# Altium PCB FlexCube_Matrix_4x4_Project_V1I1a_PCB.PcbDoc (part 1 of 2)
Units mm, origin at the board's own origin, x right, y up, seen from the top; angles counter-clockwise.
Board outline 86 x 86 mm, 2 copper layers (Top Layer, Bottom Layer), stack 0.735 mm thick; 84 components, 69 nets, 228 pads, 76 vias.
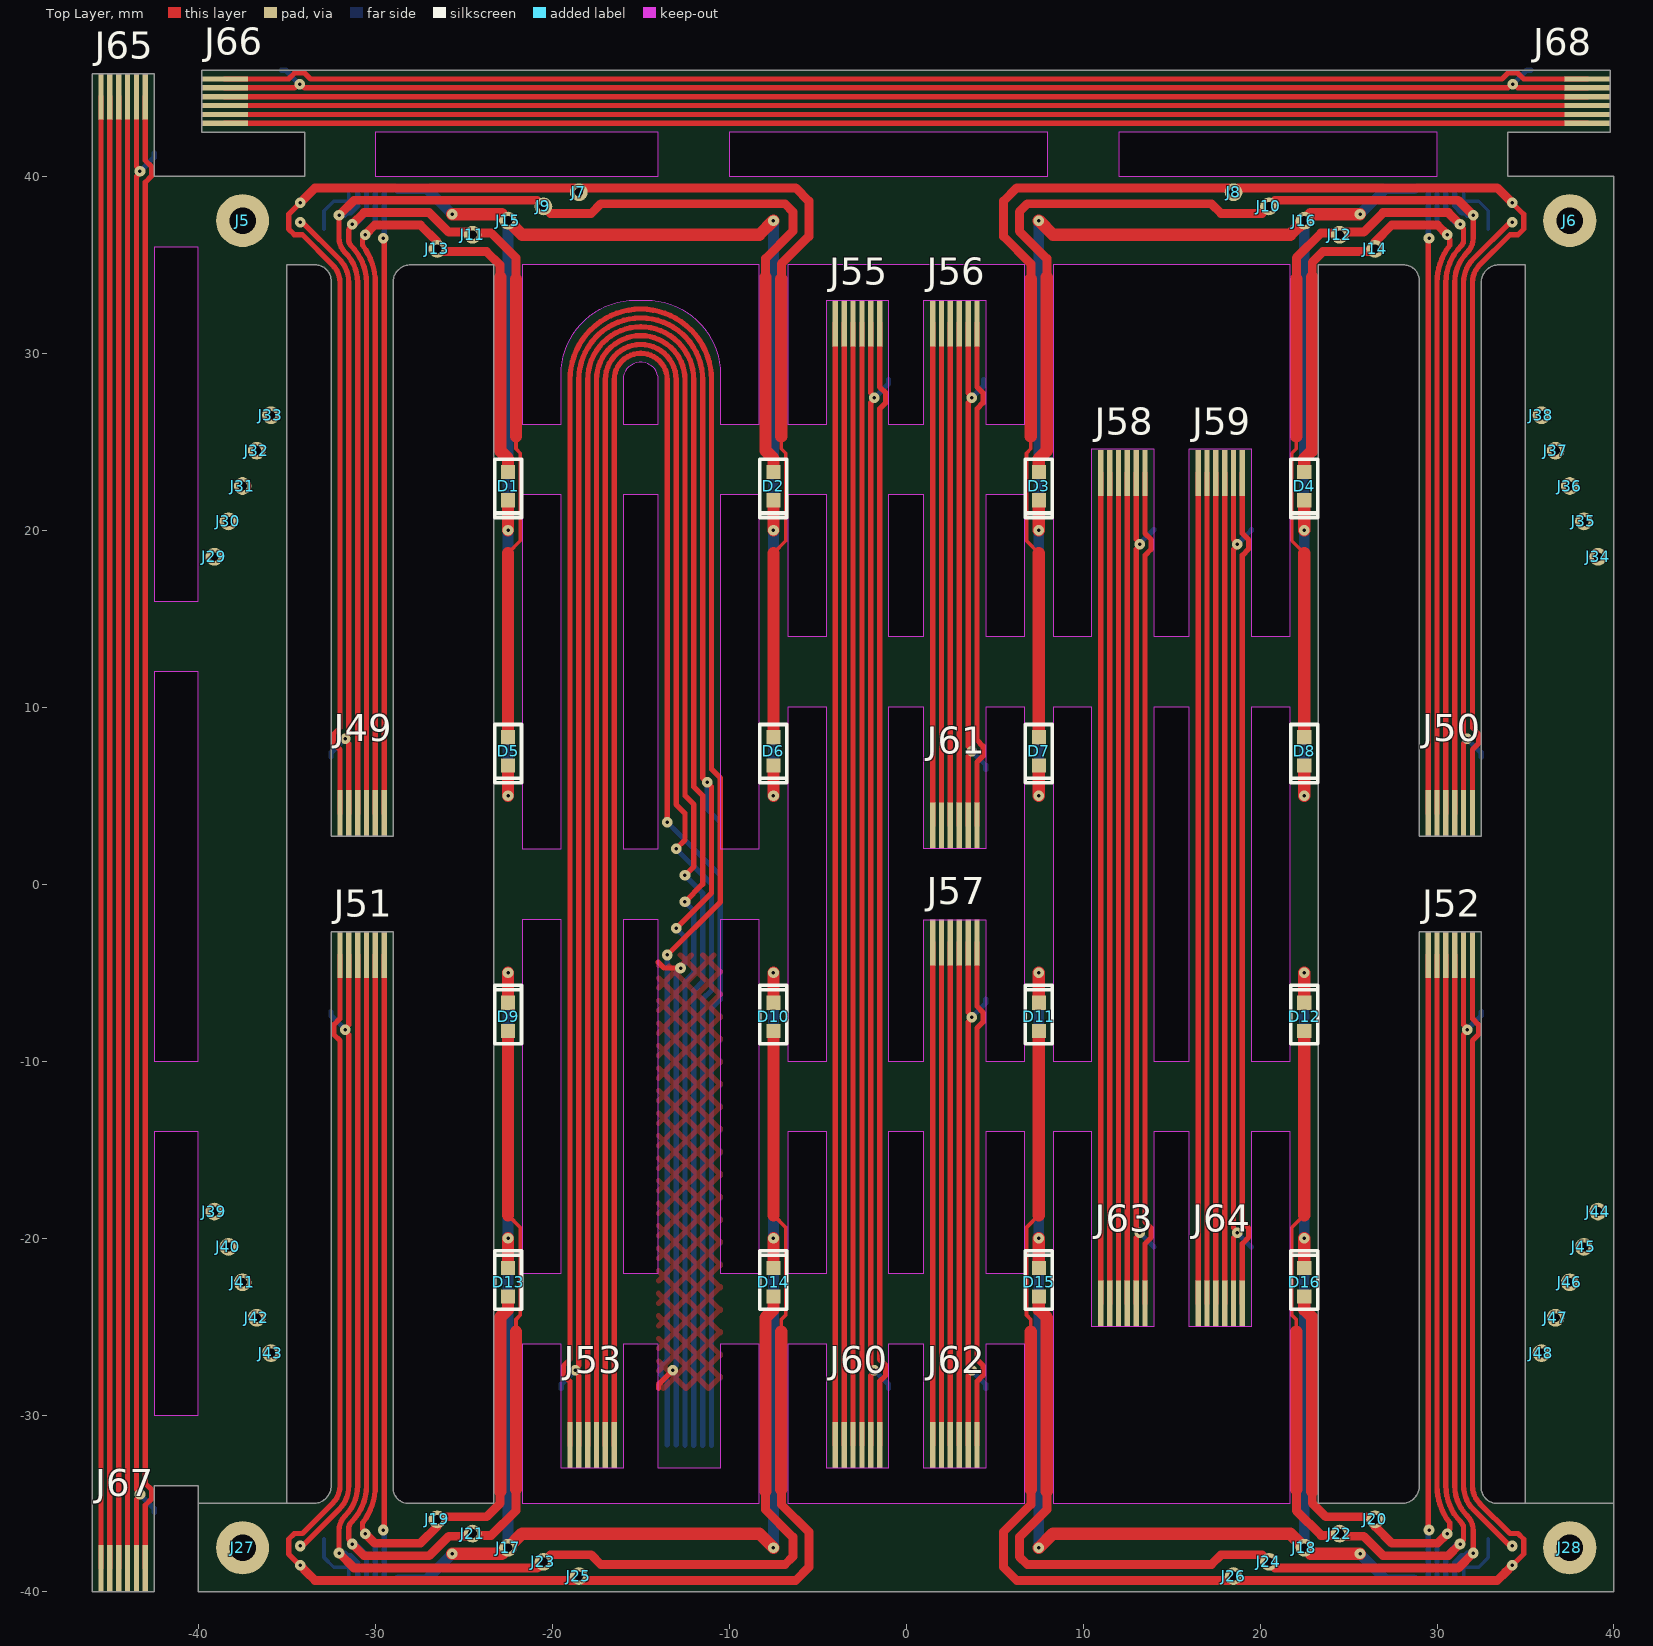
[diagram p0: Top Layer view]
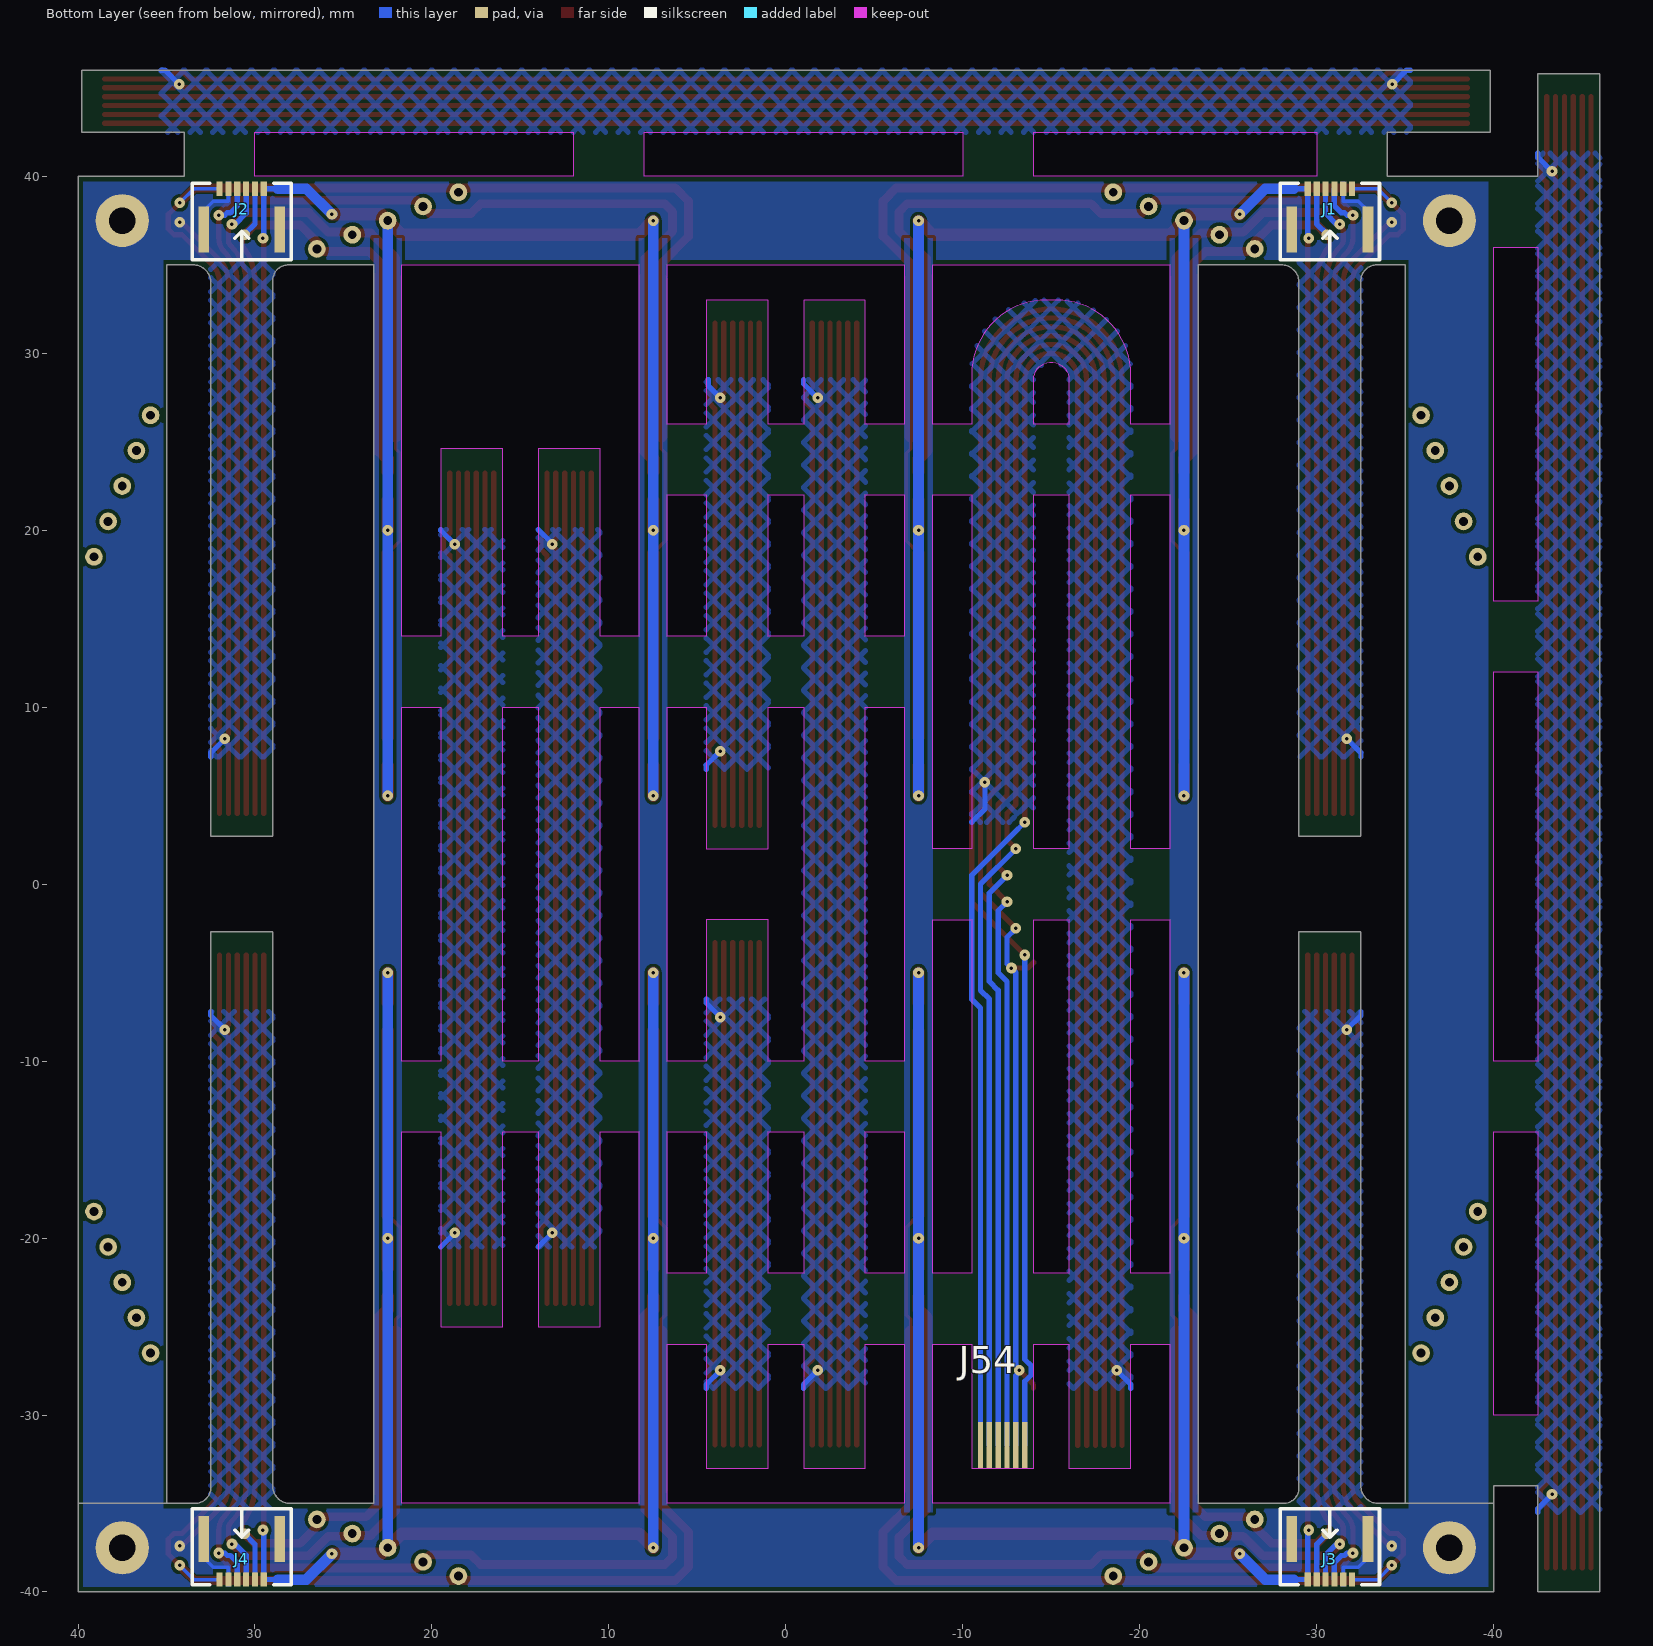
[diagram p1: Bottom Layer view, seen from below]
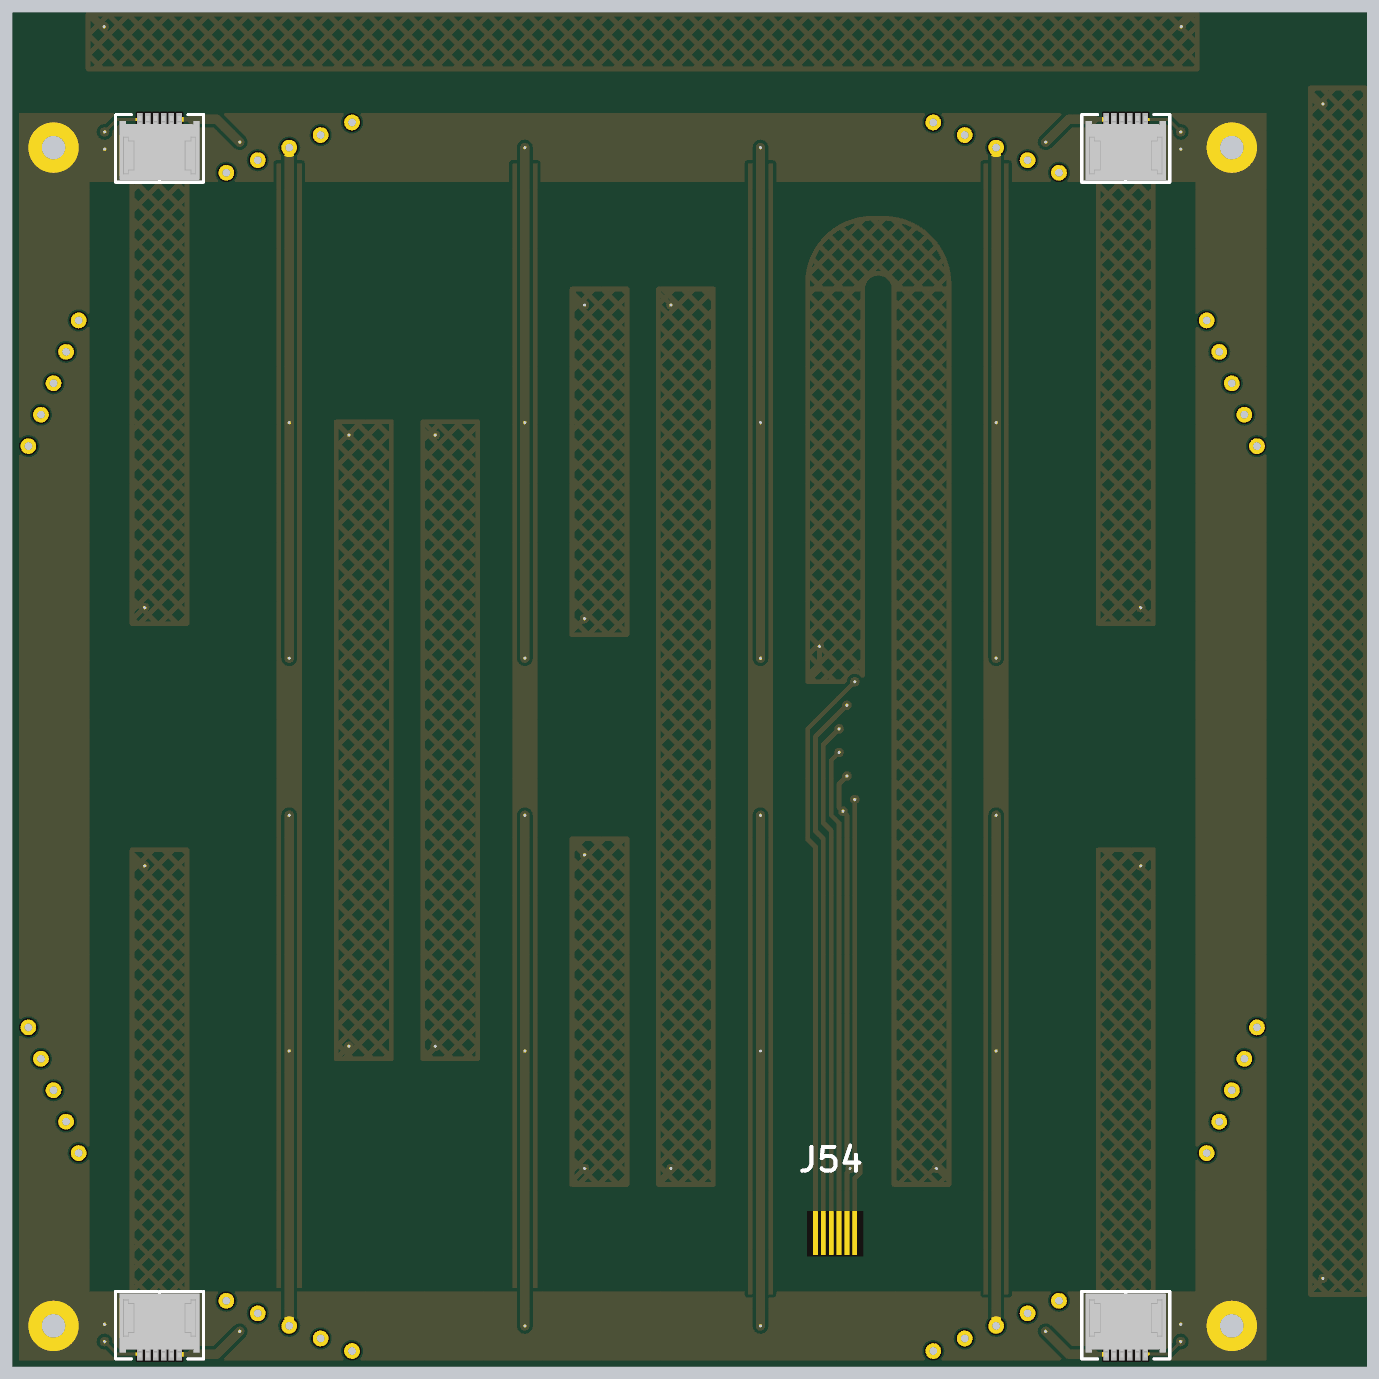
[diagram p3: 3D render of the assembled board from below, using the file's embedded part models]

## Layer stack, top to bottom
Stiffener 1: core 0.1, Core-009, Dk 4.5
No Stiffeners Top Coverlay: solder mask 0.05, FC-001, Dk 4
No Stiffeners Top Coverlay: solder mask 0.05, FC-001, Dk 4
Stiffener 5: core 0.1, Core-009, Dk 4.5
No Stiffeners Top Coverlay: solder mask 0.05, FC-001, Dk 4
Stiffener 3: core 0.1, Core-009, Dk 4.5
No Stiffeners Top Coverlay: solder mask 0.05, FC-001, Dk 4
No Stiffeners Top Coverlay: solder mask 0.05, FC-001, Dk 4
Top Layer: signal copper 0.035
Adhesive 2: prepreg 0.02, Dk 4.1
Polyimide: core 0.025, Dk 4.8
Adhesive 3: prepreg 0.02, Dk 4.1
Bottom Layer: signal copper 0.035
Bottom PI Coverlay: solder mask 0.05, FC-001, Dk 4
Bottom PI Coverlay: solder mask 0.05, FC-001, Dk 4
Stiffener 4: core 0.1, Core-009, Dk 4.5
Bottom PI Coverlay: solder mask 0.05, FC-001, Dk 4
Bottom PI Coverlay: solder mask 0.05, FC-001, Dk 4
Stiffener 6: core 0.1, Core-009, Dk 4.5
Bottom PI Coverlay: solder mask 0.05, FC-001, Dk 4
Stiffener 2: core 0.1, Core-009, Dk 4.5

## Board outline
-40,-40 40,-40 40,-35 33.369,-35 cw(c33.4,-34.101) 32.5,-34.101 32.5,-2.701 29,-2.701 29,-7.201 29,-34.001 cw(c28,-34.001) 28.031,-35 23.3,-35 23.3,35 28.1,35 cw(c28.1,34.1) 29,34.1 29,2.7 32.5,2.7 32.5,7.2 32.5,34 cw(c33.5,34) 33.5,35 35,35 35,-34.999 40,-34.999 40,35 40,40 34,40 34,42.5 39.8,42.5 39.8,46 35.3,46 -35.3,46 -39.8,46 -39.8,42.5 -35.3,42.5 -34,42.5 -34,40 -40,40 -42.5,40 -42.5,45.8 -46,45.8 -46,41.3 -46,-40 -42.5,-40 -42.5,-35.5 -42.5,-34 -40,-34 -40,-34.999 -35,-34.999 -35,35 -33.4,35 cw(c-33.4,34.1) -32.5,34.1 -32.5,2.7 -29,2.7 -29,7.2 -29,34 cw(c-28,34) -28,35 -23.3,35 -23.3,-35 -28.1,-35 cw(c-28.1,-34.1) -29,-34.1 -29,-2.7 -32.5,-2.7 -32.5,-7.2 -32.5,-34 cw(c-33.5,-34) -33.5,-35 -40,-35
cut-out: 30,40 30,42.5 12,42.5 12,40
cut-out: 8,40 8,42.5 -10,42.5 -10,40
cut-out: -30,40 -14,40 -14,42.5 -30,42.5
cut-out: -40,35 -40,36 -42.5,36 -42.5,16 -40,16
cut-out: -42.5,-30 -40,-30 -40,-14 -42.5,-14
cut-out: -42.5,-10 -40,-10 -40,12 -42.5,12
cut-out: -21.7,-35 -8.3,-35 -8.3,-26 -10.5,-26 -10.5,-33 -14,-33 -14,-28.5 -14,-26 -16,-26 -16,-33 -19.5,-33 -19.5,-28.5 -19.5,-26 -21.7,-26
cut-out: -21.7,-22 -19.5,-22 -19.5,-2 -21.7,-2
cut-out: -21.7,2 -19.5,2 -19.5,22 -21.7,22
cut-out: -10.5,-22 -8.3,-22 -8.3,-2 -10.5,-2
cut-out: -10.5,2 -8.3,2 -8.3,22 -10.5,22
cut-out: -14,-22 -14,-2 -16,-2 -16,-22
cut-out: -14,2 -14,22 -16,22 -16,2
cut-out: -6.7,-35 6.7,-35 6.7,-26 4.5,-26 4.5,-33 1,-33 1,-28.5 1,-26 -1,-26 -1,-33 -4.5,-33 -4.5,-28.5 -4.5,-26 -6.7,-26
cut-out: -6.7,-22 -4.5,-22 -4.5,-14 -6.7,-14
cut-out: -6.7,-10 -4.5,-10 -4.5,10 -6.7,10
cut-out: -6.7,14 -4.5,14 -4.5,22 -6.7,22
cut-out: -6.7,26 -4.5,26 -4.5,33 -1,33 -1,28.5 -1,26 1,26 1,33 4.5,33 4.5,28.5 4.5,26 6.7,26 6.7,35 -6.7,35
cut-out: 4.5,-22 6.7,-22 6.7,-14 4.5,-14
cut-out: 4.5,-10 6.7,-10 6.7,10 4.5,10 4.5,2 1,2 1,6.5 1,10 -1,10 -1,-10 1,-10 1,-2 4.5,-2 4.5,-6.5
cut-out: 4.5,14 6.7,14 6.7,22 4.5,22
cut-out: 1,-22 1,-14 -1,-14 -1,-22
cut-out: 1,14 1,22 -1,22 -1,14
cut-out: 8.3,-35 21.7,-35 21.7,-14 19.5,-14 19.5,-25 16,-25 16,-20.5 16,-14 14,-14 14,-25 10.5,-25 10.5,-20.5 10.5,-14 8.3,-14
cut-out: 8.3,-10 10.5,-10 10.5,10 8.3,10
cut-out: 8.3,14 10.5,14 10.5,24.6 14,24.6 14,20.1 14,14 16,14 16,24.6 19.5,24.6 19.5,20.1 19.5,14 21.7,14 21.7,35 8.3,35
cut-out: 19.5,-10 21.7,-10 21.7,10 19.5,10
cut-out: 16,-10 16,10 14,10 14,-10
cut-out: -21.7,26 -19.5,26 -19.5,28.809 cw(c-15.309,28.809) -15.309,33 -14.691,33 cw(c-14.691,28.809) -10.5,28.809 -10.5,26 -8.3,26 -8.3,35 -21.7,35
cut-out: -14,26 -14,28.5 ccw(c-15,28.5) -16,28.5 -16,26
board region "Layer Stack Region 6": -40,35 40,35 40,40 -40,40
board region "Default Layer Stack Region": -40,-40 40,-40 40,-35 -40,-35
board region "Layer Stack Region 15": 35,35 35,-34.999 40,-34.999 40,35
board region "Layer Stack Region 14": -40,35 -40,-34.999 -35,-34.999 -35,35
board region "Layer Stack Region 16": -19.5,-28.5 -19.5,28.809 -19.5,29.084 -19.428,29.628 -19.286,30.159 -19.076,30.667 -18.801,31.142 -18.467,31.578 -18.078,31.967 -17.642,32.301 -17.167,32.576 -16.659,32.786 -16.128,32.928 -15.584,33 -15.309,33 -14.691,33 -14.416,33 -13.872,32.928 -13.341,32.786 -12.833,32.576 -12.358,32.301 -11.922,31.967 -11.533,31.578 -11.199,31.142 -10.924,30.667 -10.714,30.159 -10.572,29.628 -10.5,29.084 -10.5,28.809 -10.5,-28.5 -14,-28.5 -14,28.5 -14.005,28.598 -14.043,28.79 -14.118,28.971 -14.227,29.134 -14.366,29.273 -14.529,29.382 -14.71,29.457 -14.902,29.495 -15,29.5 -15.098,29.495 -15.29,29.457 -15.471,29.382 -15.634,29.273 -15.773,29.134 -15.882,28.971 -15.957,28.79 -15.995,28.598 -16,28.5 -16,-28.5
board region "Layer Stack Region 26": -42.5,-35.5 -42.5,-8.4 -42.5,41.3 -46,41.3 -46,-8.4 -46,-35.5
board region "Layer Stack Region 37": 35.3,46 8.2,46 -35.3,46 -35.3,42.5 8.2,42.5 35.3,42.5
board region "Layer Stack Region 18": -1,-28.5 -1,28.5 -4.5,28.5 -4.5,-28.5
board region "Layer Stack Region 24": 19.5,-20.5 19.5,6.6 19.5,20.1 16,20.1 16,6.6 16,-20.5
board region "Layer Stack Region 22": 14,-20.5 14,6.6 14,20.1 10.5,20.1 10.5,6.6 10.5,-20.5
board region "Layer Stack Region 12": 32.5,7.2 32.5,34 32.505,34.098 32.543,34.29 32.618,34.471 32.727,34.634 32.866,34.773 33.029,34.882 33.21,34.957 33.402,34.995 33.5,35 28.1,35 28.188,34.996 28.361,34.961 28.524,34.894 28.671,34.796 28.796,34.671 28.894,34.524 28.961,34.361 28.996,34.188 29,34.1 29,7.2
board region "Layer Stack Region 10": -29,7.2 -29,34 -28.995,34.098 -28.957,34.29 -28.882,34.471 -28.773,34.634 -28.634,34.773 -28.471,34.882 -28.29,34.957 -28.098,34.995 -28,35 -33.4,35 -33.312,34.996 -33.139,34.961 -32.976,34.894 -32.829,34.796 -32.704,34.671 -32.606,34.524 -32.539,34.361 -32.504,34.188 -32.5,34.1 -32.5,7.2
board region "Layer Stack Region 4": 29,-7.201 29,-34.001 28.995,-34.099 28.956,-34.291 28.881,-34.472 28.773,-34.635 28.634,-34.774 28.471,-34.882 28.29,-34.957 28.098,-34.996 28,-35.001 33.4,-35.001 33.311,-34.996 33.138,-34.962 32.975,-34.894 32.829,-34.796 32.704,-34.671 32.606,-34.525 32.538,-34.362 32.504,-34.189 32.5,-34.101 32.5,-7.201
board region "Layer Stack Region 1": -32.5,-7.2 -32.5,-34 -32.505,-34.098 -32.543,-34.29 -32.618,-34.471 -32.727,-34.634 -32.866,-34.773 -33.029,-34.882 -33.21,-34.957 -33.402,-34.995 -33.5,-35 -28.1,-35 -28.188,-34.996 -28.361,-34.961 -28.524,-34.894 -28.671,-34.796 -28.796,-34.671 -28.894,-34.524 -28.961,-34.361 -28.996,-34.188 -29,-34.1 -29,-7.2
board region "Layer Stack Region 33": 4.5,6.5 4.5,28.5 1,28.5 1,6.5
board region "Layer Stack Region 20": 4.5,-28.5 4.5,-6.5 1,-6.5 1,-28.5
board region "Layer Stack Region 38": 35.3,46 39.8,46 39.8,42.5 35.3,42.5
board region "Layer Stack Region 13": 32.5,7.2 32.5,2.7 29,2.7 29,7.2
board region "Layer Stack Region 5": 29,-7.201 29,-2.701 32.5,-2.701 32.5,-7.201
board region "Layer Stack Region 25": 19.5,-20.5 19.5,-25 16,-25 16,-20.5
board region "Layer Stack Region 35": 16,20.1 16,24.6 19.5,24.6 19.5,20.1
board region "Layer Stack Region 23": 14,-20.5 14,-25 10.5,-25 10.5,-20.5
board region "Layer Stack Region 34": 10.5,20.1 10.5,24.6 14,24.6 14,20.1
board region "Layer Stack Region 32": 4.5,6.5 4.5,2 1,2 1,6.5
board region "Layer Stack Region 21": 4.5,-28.5 4.5,-33 1,-33 1,-28.5
board region "Layer Stack Region 30": 1,28.5 1,33 4.5,33 4.5,28.5
board region "Layer Stack Region 19": -1,-28.5 -1,-33 -4.5,-33 -4.5,-28.5
board region "Layer Stack Region 29": -4.5,28.5 -4.5,33 -1,33 -1,28.5
board region "Layer Stack Region 27": -10.5,-28.5 -10.5,-33 -14,-33 -14,-28.5
board region "Layer Stack Region 17": -16,-28.5 -16,-33 -19.5,-33 -19.5,-28.5
board region "Layer Stack Region 11": -29,7.2 -29,2.7 -32.5,2.7 -32.5,7.2
board region "Layer Stack Region 2": -32.5,-7.2 -32.5,-2.7 -29,-2.7 -29,-7.2
board region "Layer Stack Region 39": -35.3,42.5 -39.8,42.5 -39.8,46 -35.3,46
board region "Layer Stack Region 28": -42.5,-35.5 -42.5,-40 -46,-40 -46,-35.5
board region "Layer Stack Region 36": -46,41.3 -46,45.8 -42.5,45.8 -42.5,41.3
board region "Layer Stack Region 31": 1,-6.5 1,-2 4.5,-2 4.5,-6.5
board region "Layer Stack Region 9": 21.7,-35 21.7,-34.9 21.7,34.9 21.7,35 23.3,35 23.3,34.9 23.3,-34.9 23.3,-35
board region "Layer Stack Region 8": 6.7,-35 6.7,-34.9 6.7,34.9 6.7,35 8.3,35 8.3,34.9 8.3,-34.9 8.3,-35
board region "Layer Stack Region 7": -8.3,-35 -8.3,-34.9 -8.3,34.9 -8.3,35 -6.7,35 -6.7,34.9 -6.7,-34.9 -6.7,-35
board region "Layer Stack Region 3": -23.3,-35 -23.3,-34.9 -23.3,34.9 -23.3,35 -21.7,35 -21.7,34.9 -21.7,-34.9 -21.7,-35
board region "Layer Stack Region 74": 34,40 30,40 30,42.5 34,42.5
board region "Layer Stack Region 73": 12,40 8,40 8,42.5 12,42.5
board region "Layer Stack Region 72": -10,40 -14,40 -14,42.5 -10,42.5
board region "Layer Stack Region 71": -30,40 -34,40 -34,42.5 -30,42.5
board region "Layer Stack Region 67": -42.5,36 -42.5,40 -40,40 -40,36
board region "Layer Stack Region 69": -42.5,12 -42.5,16 -40,16 -40,12
board region "Layer Stack Region 70": -42.5,-14 -42.5,-10 -40,-10 -40,-14
board region "Layer Stack Region 68": -42.5,-34 -42.5,-30 -40,-30 -40,-34
board region "Layer Stack Region 40": 19.5,14 19.5,10 21.7,10 21.7,14
board region "Layer Stack Region 41": 19.5,-14 19.5,-10 21.7,-10 21.7,-14
board region "Layer Stack Region 44": 8.3,14 8.3,10 10.5,10 10.5,14
board region "Layer Stack Region 45": 8.3,-14 8.3,-10 10.5,-10 10.5,-14
board region "Layer Stack Region 47": 4.5,22 4.5,26 6.7,26 6.7,22
board region "Layer Stack Region 46": 4.5,14 4.5,10 6.7,10 6.7,14
board region "Layer Stack Region 48": 4.5,-14 4.5,-10 6.7,-10 6.7,-14
board region "Layer Stack Region 49": 4.5,-22 4.5,-26 6.7,-26 6.7,-22
board region "Layer Stack Region 56": -6.7,22 -6.7,26 -4.5,26 -4.5,22
board region "Layer Stack Region 57": -6.7,14 -6.7,10 -4.5,10 -4.5,14
board region "Layer Stack Region 55": -6.7,-14 -6.7,-10 -4.5,-10 -4.5,-14
board region "Layer Stack Region 54": -6.7,-22 -6.7,-26 -4.5,-26 -4.5,-22
board region "Layer Stack Region 58": -10.5,22 -10.5,26 -8.3,26 -8.3,22
board region "Layer Stack Region 59": -10.5,-2 -10.5,2 -8.3,2 -8.3,-2
board region "Layer Stack Region 60": -10.5,-26 -10.5,-22 -8.3,-22 -8.3,-26
board region "Layer Stack Region 66": -21.7,22 -21.7,26 -19.5,26 -19.5,22
board region "Layer Stack Region 65": -21.7,-2 -21.7,2 -19.5,2 -19.5,-2
board region "Layer Stack Region 64": -21.7,-26 -21.7,-22 -19.5,-22 -19.5,-26
board region "Layer Stack Region 43": 14,14 14,10 16,10 16,14
board region "Layer Stack Region 42": 14,-14 14,-10 16,-10 16,-14
board region "Layer Stack Region 52": -1,22 -1,26 1,26 1,22
board region "Layer Stack Region 53": -1,14 -1,10 1,10 1,14
board region "Layer Stack Region 51": -1,-14 -1,-10 1,-10 1,-14
board region "Layer Stack Region 50": -1,-22 -1,-26 1,-26 1,-22
board region "Layer Stack Region 63": -16,22 -16,26 -14,26 -14,22
board region "Layer Stack Region 62": -16,-2 -16,2 -14,2 -14,-2
board region "Layer Stack Region 61": -16,-26 -16,-22 -14,-22 -14,-26

## Design rules (kind name [scope] priority, off if disabled: settings)
BoardOutlineClearance "Outline vs Silk" [(OnLayer('Top Overlay') OR OnLayer('Bottom Overlay'))] p1 off: gap=0.1 ignorepadtopadclearanceinfootprint=FALSE
BoardOutlineClearance "Connector exception" [HasFootprint('0512810694')] p2 off: gap=0.2 ignorepadtopadclearanceinfootprint=FALSE
BoardOutlineClearance "FFC Exception" [HasFootprint('FFC_ENDING_0512810694')] p3 off: gap=0.1 ignorepadtopadclearanceinfootprint=FALSE except(0: SMDPad-OutlineEdge SMDPad-CavityEdge SMDPad-CutoutEdge SMDPad-SplitBarrior SMDPad-SplitContinuation)
BoardOutlineClearance [All] p4 off: gap=0.3 ignorepadtopadclearanceinfootprint=FALSE except(0: Arc-SplitContinuation Track-SplitContinuation SMDPad-SplitContinuation THPad-SplitContinuation Via-SplitContinuation Fill-SplitContinuation Poly-SplitContinuation Region-SplitContinuation; 0.1: Text-OutlineEdge Text-CavityEdge Text-CutoutEdge Text-SplitBarrior Text-SplitContinuation)
Clearance "Under connector" [HasFootprint('0512810694')] p1: gap=0.2 ignorepadtopadclearanceinfootprint=FALSE except(0.1: Arc-SMDPad Track-SMDPad SMDPad-SMDPad)
Clearance "FFC Clearance" [All vs HasFootprint('FFC_ENDING_0512810694')] p2: gap=0.01 ignorepadtopadclearanceinfootprint=FALSE
Clearance [All] p3: gap=0.2 ignorepadtopadclearanceinfootprint=FALSE
DiffPairsRouting [All] p1: maxlimit=0.254 minlimit=0.254 mostfreqgap=0.254 substack1={4D4FE3D4-C86A-4D8D-9A31-E9C674529DF9} toplayer_{4d4fe3d4-c86a-4d8d-9a31-e9c674529df9}_minwidth=0.381 toplayer_{4d4fe3d4-c86a-4d8d-9a31-e9c674529df9}_maxwidth=0.381 toplayer_{4d4fe3d4-c86a-4d8d-9a31-e9c674529df9}_prefwidth=0.381 bottomlayer_{4d4fe3d4-c86a-4d8d-9a31-e9c674529df9}_minwidth=0.381 bottomlayer_{4d4fe3d4-c86a-4d8d-9a31-e9c674529df9}_maxwidth=0.381 bottomlayer_{4d4fe3d4-c86a-4d8d-9a31-e9c674529df9}_prefwidth=0.381 substack2={CABC8916-1110-40C6-A124-50F6A54FA35A} toplayer_{cabc8916-1110-40c6-a124-50f6a54fa35a}_minwidth=0.381 toplayer_{cabc8916-1110-40c6-a124-50f6a54fa35a}_maxwidth=0.381 toplayer_{cabc8916-1110-40c6-a124-50f6a54fa35a}_prefwidth=0.381 bottomlayer_{cabc8916-1110-40c6-a124-50f6a54fa35a}_minwidth=0.381 bottomlayer_{cabc8916-1110-40c6-a124-50f6a54fa35a}_maxwidth=0.381 bottomlayer_{cabc8916-1110-40c6-a124-50f6a54fa35a}_prefwidth=0.381 substack3={34FC4AC9-0BA1-41C3-8501-FC3EAB3F46DA} toplayer_{34fc4ac9-0ba1-41c3-8501-fc3eab3f46da}_minwidth=0.381 toplayer_{34fc4ac9-0ba1-41c3-8501-fc3eab3f46da}_maxwidth=0.381 toplayer_{34fc4ac9-0ba1-41c3-8501-fc3eab3f46da}_prefwidth=0.381 bottomlayer_{34fc4ac9-0ba1-41c3-8501-fc3eab3f46da}_minwidth=0.381 bottomlayer_{34fc4ac9-0ba1-41c3-8501-fc3eab3f46da}_maxwidth=0.381 bottomlayer_{34fc4ac9-0ba1-41c3-8501-fc3eab3f46da}_prefwidth=0.381 substack4={C53A0A96-B777-486A-9665-F5F59052C0ED} toplayer_{c53a0a96-b777-486a-9665-f5f59052c0ed}_minwidth=0.381 toplayer_{c53a0a96-b777-486a-9665-f5f59052c0ed}_maxwidth=0.381 toplayer_{c53a0a96-b777-486a-9665-f5f59052c0ed}_prefwidth=0.381 bottomlayer_{c53a0a96-b777-486a-9665-f5f59052c0ed}_minwidth=0.381 bottomlayer_{c53a0a96-b777-486a-9665-f5f59052c0ed}_maxwidth=0.381 bottomlayer_{c53a0a96-b777-486a-9665-f5f59052c0ed}_prefwidth=0.381 toplayer_minwidth=0.381 toplayer_maxwidth=0.381 toplayer_prefwidth=0.381 bottomlayer_minwidth=0.381 bottomlayer_maxwidth=0.381 bottomlayer_prefwidth=0.381 substack5={CB2A3869-3EAB-46B1-B9AD-A7A7CE6A4B21} toplayer_{cb2a3869-3eab-46b1-b9ad-a7a7ce6a4b21}_minwidth=0.381 toplayer_{cb2a3869-3eab-46b1-b9ad-a7a7ce6a4b21}_maxwidth=0.381 toplayer_{cb2a3869-3eab-46b1-b9ad-a7a7ce6a4b21}_prefwidth=0.381 bottomlayer_{cb2a3869-3eab-46b1-b9ad-a7a7ce6a4b21}_minwidth=0.381 bottomlayer_{cb2a3869-3eab-46b1-b9ad-a7a7ce6a4b21}_maxwidth=0.381 bottomlayer_{cb2a3869-3eab-46b1-b9ad-a7a7ce6a4b21}_prefwidth=0.381 substack6={19DDFB09-C3BA-4E3F-9BBF-CB30F192C395} toplayer_{19ddfb09-c3ba-4e3f-9bbf-cb30f192c395}_minwidth=0.381 toplayer_{19ddfb09-c3ba-4e3f-9bbf-cb30f192c395}_maxwidth=0.381 toplayer_{19ddfb09-c3ba-4e3f-9bbf-cb30f192c395}_prefwidth=0.381 bottomlayer_{19ddfb09-c3ba-4e3f-9bbf-cb30f192c395}_minwidth=0.381 bottomlayer_{19ddfb09-c3ba-4e3f-9bbf-cb30f192c395}_maxwidth=0.381 bottomlayer_{19ddfb09-c3ba-4e3f-9bbf-cb30f192c395}_prefwidth=0.381 maxuncoupledlength=12.7
HoleSize [All] p1: absolutevalues=TRUE maxlimit=2.54 minlimit=0 maxpercent=80.000 minpercent=20.000
PlaneClearance [All] p1: clearance=0.3
PolygonConnect [All] p1: connectstyle=Direct reliefconductorwidth=0.254 reliefentries=4 polygonreliefangle="90 Angle" airgapwidth=0.254
RoutingVias [All] p1: holewidth=0.2 width=0.6 viastyle="Through Hole" minholewidth=0.2 minwidth=0.6 maxholewidth=0.2 maxwidth=0.6
SilkToSolderMaskClearance [IsPad] p1: minsilkscreentomaskgap=0.1 clearancetoexposedcopper=TRUE
SolderMaskExpansion [All] p1: expansion=0.102 istentingtop=FALSE
Width [All] p1: maxlimit=5 minlimit=0.2 preferedwidth=0.3 substack1={4D4FE3D4-C86A-4D8D-9A31-E9C674529DF9} substack2={CABC8916-1110-40C6-A124-50F6A54FA35A} substack3={34FC4AC9-0BA1-41C3-8501-FC3EAB3F46DA} substack4={C53A0A96-B777-486A-9665-F5F59052C0ED} substack5={CB2A3869-3EAB-46B1-B9AD-A7A7CE6A4B21} substack6={19DDFB09-C3BA-4E3F-9BBF-CB30F192C395}
26 further rules are at their usual default settings.

## Components (designator, comment, footprint, x,y, rotation, side; value= is the part's Value field where it differs from the comment)
D1 "Red" LED_0603 -22.5,22.5 r90 top
D2 "Red" LED_0603 -7.5,22.5 r90 top
D3 "Red" LED_0603 7.5,22.5 r90 top
D4 "Red" LED_0603 22.5,22.5 r90 top
D5 "Red" LED_0603 -22.5,7.5 r90 top
D6 "Red" LED_0603 -7.5,7.5 r90 top
D7 "Red" LED_0603 7.5,7.5 r90 top
D8 "Red" LED_0603 22.5,7.5 r90 top
D9 "Red" LED_0603 -22.5,-7.5 r270 top
D10 "Red" LED_0603 -7.5,-7.5 r270 top
D11 "Red" LED_0603 7.5,-7.5 r270 top
D12 "Red" LED_0603 22.5,-7.5 r270 top
D13 "Red" LED_0603 -22.5,-22.5 r270 top
D14 "Red" LED_0603 -7.5,-22.5 r270 top
D15 "Red" LED_0603 7.5,-22.5 r270 top
D16 "Red" LED_0603 22.5,-22.5 r270 top
J1 "Molex 0512810694" 0512810694 -30.75,37 r270 bottom
J2 "Molex 0512810694" 0512810694 30.75,37 r270 bottom
J3 "Molex 0512810694" 0512810694 -30.75,-37 r90 bottom
J4 "Molex 0512810694" 0512810694 30.75,-37 r90 bottom
J5 "PAD D3MM H1MM5" PAD_D3MM_H1MM5 -37.5,37.5 r0 top
J6 "PAD D3MM H1MM5" PAD_D3MM_H1MM5 37.5,37.5 r0 top
J7 "PAD D1MM H0MM5" PAD_D1MM_H0MM5 -18.5,39.1 r0 top
J8 "PAD D1MM H0MM5" PAD_D1MM_H0MM5 18.5,39.1 r0 top
J9 "PAD D1MM H0MM5" PAD_D1MM_H0MM5 -20.5,38.3 r0 top
J10 "PAD D1MM H0MM5" PAD_D1MM_H0MM5 20.5,38.3 r90 top
J11 "PAD D1MM H0MM5" PAD_D1MM_H0MM5 -24.5,36.7 r90 top
J12 "PAD D1MM H0MM5" PAD_D1MM_H0MM5 24.5,36.7 r90 top
J13 "PAD D1MM H0MM5" PAD_D1MM_H0MM5 -26.5,35.9 r90 top
J14 "PAD D1MM H0MM5" PAD_D1MM_H0MM5 26.5,35.9 r90 top
J15 "PAD D1MM H0MM5" PAD_D1MM_H0MM5 -22.5,37.5 r90 top
J16 "PAD D1MM H0MM5" PAD_D1MM_H0MM5 22.5,37.5 r90 top
J17 "PAD D1MM H0MM5" PAD_D1MM_H0MM5 -22.5,-37.5 r90 top
J18 "PAD D1MM H0MM5" PAD_D1MM_H0MM5 22.5,-37.5 r90 top
J19 "PAD D1MM H0MM5" PAD_D1MM_H0MM5 -26.5,-35.9 r90 top
J20 "PAD D1MM H0MM5" PAD_D1MM_H0MM5 26.5,-35.9 r90 top
J21 "PAD D1MM H0MM5" PAD_D1MM_H0MM5 -24.5,-36.7 r90 top
J22 "PAD D1MM H0MM5" PAD_D1MM_H0MM5 24.5,-36.7 r90 top
J23 "PAD D1MM H0MM5" PAD_D1MM_H0MM5 -20.5,-38.3 r90 top
J24 "PAD D1MM H0MM5" PAD_D1MM_H0MM5 20.5,-38.3 r90 top
J25 "PAD D1MM H0MM5" PAD_D1MM_H0MM5 -18.5,-39.1 r90 top
J26 "PAD D1MM H0MM5" PAD_D1MM_H0MM5 18.5,-39.1 r90 top
J27 "PAD D3MM H1MM5" PAD_D3MM_H1MM5 -37.5,-37.5 r0 top
J28 "PAD D3MM H1MM5" PAD_D3MM_H1MM5 37.5,-37.5 r0 top
J29 "PAD D1MM H0MM5" PAD_D1MM_H0MM5 -39.1,18.5 r90 top
J30 "PAD D1MM H0MM5" PAD_D1MM_H0MM5 -38.3,20.5 r90 top
J31 "PAD D1MM H0MM5" PAD_D1MM_H0MM5 -37.5,22.5 r90 top
J32 "PAD D1MM H0MM5" PAD_D1MM_H0MM5 -36.7,24.5 r90 top
J33 "PAD D1MM H0MM5" PAD_D1MM_H0MM5 -35.9,26.5 r90 top
J34 "PAD D1MM H0MM5" PAD_D1MM_H0MM5 39.1,18.5 r90 top
J35 "PAD D1MM H0MM5" PAD_D1MM_H0MM5 38.3,20.5 r90 top
J36 "PAD D1MM H0MM5" PAD_D1MM_H0MM5 37.5,22.5 r90 top
J37 "PAD D1MM H0MM5" PAD_D1MM_H0MM5 36.7,24.5 r90 top
J38 "PAD D1MM H0MM5" PAD_D1MM_H0MM5 35.9,26.5 r90 top
J39 "PAD D1MM H0MM5" PAD_D1MM_H0MM5 -39.1,-18.5 r90 top
J40 "PAD D1MM H0MM5" PAD_D1MM_H0MM5 -38.3,-20.5 r90 top
J41 "PAD D1MM H0MM5" PAD_D1MM_H0MM5 -37.5,-22.5 r90 top
J42 "PAD D1MM H0MM5" PAD_D1MM_H0MM5 -36.7,-24.5 r90 top
J43 "PAD D1MM H0MM5" PAD_D1MM_H0MM5 -35.9,-26.5 r90 top
J44 "PAD D1MM H0MM5" PAD_D1MM_H0MM5 39.1,-18.5 r90 top
J45 "PAD D1MM H0MM5" PAD_D1MM_H0MM5 38.3,-20.5 r90 top
J46 "PAD D1MM H0MM5" PAD_D1MM_H0MM5 37.5,-22.5 r90 top
J47 "PAD D1MM H0MM5" PAD_D1MM_H0MM5 36.7,-24.5 r90 top
J48 "PAD D1MM H0MM5" PAD_D1MM_H0MM5 35.9,-26.5 r90 top
J49 "FFC ENDING 0512810694" FFC_ENDING_0512810694 -30.75,4.01 r270 top
J50 "FFC ENDING 0512810694" FFC_ENDING_0512810694 30.75,4.01 r270 top
J51 "FFC ENDING 0512810694" FFC_ENDING_0512810694 -30.75,-4.01 r90 top
J52 "FFC ENDING 0512810694" FFC_ENDING_0512810694 30.75,-4.01 r90 top
J53 "FFC ENDING 0512810694" FFC_ENDING_0512810694 -17.75,-31.69 r270 top
J54 "FFC ENDING 0512810694" FFC_ENDING_0512810694 -12.25,-31.69 r270 bottom
J55 "FFC ENDING 0512810694" FFC_ENDING_0512810694 -2.75,31.69 r90 top
J56 "FFC ENDING 0512810694" FFC_ENDING_0512810694 2.75,31.69 r90 top
J57 "FFC ENDING 0512810694" FFC_ENDING_0512810694 2.75,-3.31 r90 top
J58 "FFC ENDING 0512810694" FFC_ENDING_0512810694 12.25,23.234 r90 top
J59 "FFC ENDING 0512810694" FFC_ENDING_0512810694 17.75,23.234 r90 top
J60 "FFC ENDING 0512810694" FFC_ENDING_0512810694 -2.75,-31.69 r270 top
J61 "FFC ENDING 0512810694" FFC_ENDING_0512810694 2.75,3.31 r270 top
J62 "FFC ENDING 0512810694" FFC_ENDING_0512810694 2.75,-31.69 r270 top
J63 "FFC ENDING 0512810694" FFC_ENDING_0512810694 12.25,-23.69 r270 top
J64 "FFC ENDING 0512810694" FFC_ENDING_0512810694 17.75,-23.69 r270 top
J65 "FFC ENDING 0512810694" FFC_ENDING_0512810694 -44.25,44.5 r90 top
J66 "FFC ENDING 0512810694" FFC_ENDING_0512810694 -38.5,44.25 r180 top
J67 "FFC ENDING 0512810694" FFC_ENDING_0512810694 -44.25,-38.65 r270 top
J68 "FFC ENDING 0512810694" FFC_ENDING_0512810694 38.5,44.25 r0 top

## Footprints (in the part's own frame and the unit in brackets; to place one, negate y for a bottom-side part, rotate by r counter-clockwise, add the part's x,y. Pads: shape width x height; smd on the part's side, far side on the other; paste and mask are expansions set on the pad)
0512810694 [mm]
  rect 0.8x0.35 smd: 1(-2.3,1.25) 2(-2.3,0.75) 3(-2.3,0.25) 4(-2.3,-0.25) 5(-2.3,-0.75) 6(-2.3,-1.25)
  rect 2.6x0.6 smd: 7(0,-2.15) 8(0,2.15)
  silkscreen extent -2.6,-2.8 1.7,2.8, body extent -2.5,-2.55 1.55,2.55, height 1.21
FFC_ENDING_0512810694 [mm]
  rect 2.6x0.3 smd paste-10: 1(0,1.25) 2(0,0.75) 3(0,0.25) 4(0,-0.25) 5(0,-0.75) 6(0,-1.25)
LED_0603 [mm]
  rect 0.8x0.8 smd: 1(-0.8,0) 2(0.8,0)
  silkscreen extent -1.78,-0.76 1.52,0.76, body extent -0.85,-0.4 0.85,0.4, height 0.66
PAD_D1MM_H0MM5 [mm]
  round 1 hole 0.5: 1(0,0)
PAD_D3MM_H1MM5 [mm]
  round 3 hole 1.5: 1(0,0)

## Part data
D1 D2 D3 D4 D5 D6 D7 D8 D9 D10 D11 D12 D13 D14 D15 D16: library part "LS L29K-H1J2-1-Z", "LED SMARTLED RED 630NM 0603 SMD", Current - Test=2mA, Luminous Flux @ Current - Test="20 mlm", Manufacturer="OSRAM Opto Semiconductors Inc", Millicandela Rating=4.95mcd, Package / Case="0603 (1608 Metric)", Supplier Part Number 1=475-1195-1-ND, Voltage - Forward (Vf) Typ=1.8V, .Checked PCB=used, .Checked SCH=used, Category=Optoelectronics, Color=Red, ComponentLink1Description=http://catalog.osram-os.com/catalogue/catalogue.do;jsessionid=DB7CFDBAC5AF1E216E45F622E867085A?act=downloadFile&favOid=020000010003f9de000100b6, ComponentLink1URL=http://catalog.osram-os.com/catalogue/catalogue.do;jsessionid=DB7CFDBAC5AF1E216E45F622E867085A?act=downloadFile&favOid=020000010003f9de000100b6, Height=0.65mm, Lens Style/Size="Rectangle with Flat Top, 1.3mm x 0.8mm", Lens Type=Diffused, Manufacturer Part Number="LS L29K-H1J2-1-Z", Mounting Type="Surface Mount", Packaging="Cut Tape (CT)", Pricing 1="1=0.16, 10=0.137, 100=0.1093, 250=0.09564, 500=0.08744 (USD)", RoHS="RoHS Compliant", Size / Dimension="1.70mm L x 0.80mm W", Stock 1=71670, Supplier 1=Digi-Key, Viewing Angle=160°, Wavelength - Dominant=630nm, Wavelength - Peak=643nm
J1 J2 J3 J4: library part 0512810694, "Conn FPC Connector SKT 6 POS 0.5mm Solder RA SMD Easy-On™ Embossed T/R", Contact Resistance=20mR, Current Rating=500mA, Flammability Rating="UL94 V-0", Housing Colour=Natural, Manufacturer=Molex, Max Operating Temperature=85°C, Min Operating Temperature=-20°C, Package Quantity=3000, Supplier Part Number 1=WM10922DKR-ND, Voltage Rating=50V, .Creator=RF, Category="Connectors, Interconnects", ComponentLink1Description=http://www.molex.com/pdm_docs/sd/512810694_sd.pdf, ComponentLink1URL=http://www.molex.com/pdm_docs/sd/512810694_sd.pdf, ComponentLink2Description=http://www.molex.com/webdocs/datasheets/pdf/en-us/0512810694_FFC_FPC_CONNECTORS.pdf, ComponentLink2URL=http://www.molex.com/webdocs/datasheets/pdf/en-us/0512810694_FFC_FPC_CONNECTORS.pdf, ComponentLink3Description=https://www.verical.com/server-webapp/html/getDatasheet?partID=195210, ComponentLink3URL=https://www.verical.com/server-webapp/html/getDatasheet?partID=195210, Contact Material=Bronze, Contact Plating=Gold, Depth=3.75mm, Housing Material=Polymer, Length=5.1mm, Manufacturer Part Number=0512810694, Mount="Surface Mount", Number of Contacts=6, Number of Positions=6, Number of Rows=1, Orientation="Right Angle", Packaging="Tape and Reel", Pitch=0.5mm, Pricing 1="1=0.54, 10=0.507, 25=0.456, 50=0.4056, 100=0.3886, 250=0.3548, 500=0.33792, 1000=0.27878 (USD)", Radiation Hardening=No, Stock 1=21985, Supplier 1=Digi-Key, Termination=Solder, Wire/Cable Type=Straight

## Via types
v1: diameter 0.6, hole 0.2, Top Layer to Bottom Layer, tented both sides, 76 vias

## Nets (pads, with @x,y where several pads share a name; then routed paths per layer and width w, separated by ;. In a path a pad name is that pad's centre, name@x,y a point inside that pad or via, vN(x,y) a via of type N, cw(c..) or ccw(c..) an arc to the next point about the centre after c; other vN are vias at no path point)
COMMON_CATHODE_1: D1.1 D2.1 D5.1 D6.1 J1.6 J15.1 J49.1 | length 130.9
  Top Layer w0.2: v1(-22.5,20) -22.5,20.4 ; v1(-7.5,20) -7.5,20.4
  Top Layer w0.3: v1(-29.55,36.5) -29.5,36.45 -29.5,35.1 J49.1@-29.5,4.01 J49.1@-29.5,4
  Top Layer w0.7: v1(-25.65,37.85) J15.1@-22.85,37.85 ; v1(-22.5,5) D5.1@-22.5,6.7 ; v1(-22.5,20) D1.1@-22.5,21.7 ; J15.1@-22.5,37.5 -21.7,36.7 -8.3,36.7 v1(-7.5,37.5) ; v1(-7.5,5) D6.1@-7.5,6.7 ; v1(-7.5,20) D2.1@-7.5,21.7
  Bottom Layer w0.3: v1(-29.55,36.5) -29.5,36.55 J1.6@-29.5,39.3 -28.701,39.3 -28.7,39.299
  Bottom Layer w0.6: -28.7,39.299 -27.099,39.299 v1(-25.65,37.85) ; v1(-22.5,5) v1(-22.5,20) J15.1@-22.5,37.5 ; v1(-7.5,5) v1(-7.5,37.5)
COMMON_CATHODE_2: D3.1 D4.1 D7.1 D8.1 J2.1 J16.1 J50.6 | length 130.9
  Top Layer w0.2: v1(7.5,20) 7.5,20.4 ; v1(22.5,20) 22.5,20.4
  Top Layer w0.3: J50.6@29.5,4 J50.6@29.5,4.01 29.5,35.1 29.5,36.45 v1(29.55,36.5)
  Top Layer w0.7: v1(7.5,5) D7.1@7.5,6.7 ; v1(7.5,20) D3.1@7.5,21.7 ; v1(7.5,37.5) 8.3,36.7 21.7,36.7 J16.1@22.5,37.5 ; v1(22.5,5) D8.1@22.5,6.7 ; v1(22.5,20) D4.1@22.5,21.7 ; J16.1@22.85,37.85 v1(25.65,37.85)
  Bottom Layer w0.3: 28.7,39.299 28.701,39.3 J2.1@29.5,39.3 29.5,36.55 v1(29.55,36.5)
  Bottom Layer w0.6: v1(7.5,5) v1(7.5,20) v1(7.5,37.5) ; v1(22.5,5) v1(22.5,20) J16.1@22.5,37.5 ; v1(25.65,37.85) 27.099,39.299 28.7,39.299
COMMON_CATHODE_3: D9.1 D10.1 D13.1 D14.1 J3.1 J17.1 J51.6 | length 130.9
  Top Layer w0.2: -22.5,-20.4 v1(-22.5,-20)
  Top Layer w0.3: v1(-29.55,-36.5) -29.5,-36.45 -29.5,-35.1 J51.6@-29.5,-4.01 J51.6@-29.5,-4
  Top Layer w0.7: v1(-25.65,-37.85) -22.85,-37.85 J17.1@-22.5,-37.5 -21.7,-36.7 -8.3,-36.7 v1(-7.5,-37.5) ; D13.1@-22.5,-21.7 v1(-22.5,-20) ; D9.1@-22.5,-6.7 v1(-22.5,-5) ; D14.1@-7.5,-21.7 v1(-7.5,-20) ; D10.1@-7.5,-6.7 v1(-7.5,-5)
  Bottom Layer w0.3: v1(-29.55,-36.5) -29.5,-36.55 J3.1@-29.5,-39.3 -28.701,-39.3 -28.7,-39.299
  Bottom Layer w0.6: -28.7,-39.299 -27.099,-39.299 v1(-25.65,-37.85) ; J17.1@-22.5,-37.5 v1(-22.5,-20) v1(-22.5,-5) ; v1(-7.5,-37.5) v1(-7.5,-5)
COMMON_CATHODE_4: D11.1 D12.1 D15.1 D16.1 J4.6 J18.1 J52.1 | length 130.9
  Top Layer w0.2: 7.5,-20.4 v1(7.5,-20) ; 22.5,-20.4 v1(22.5,-20)
  Top Layer w0.3: J52.1@29.5,-4 J52.1@29.5,-4.01 29.5,-35.1 29.5,-36.45 v1(29.55,-36.5)
  Top Layer w0.7: v1(7.5,-37.5) 8.3,-36.7 21.7,-36.7 J18.1@22.5,-37.5 ; D15.1@7.5,-21.7 v1(7.5,-20) ; D11.1@7.5,-6.7 v1(7.5,-5) ; D16.1@22.5,-21.7 v1(22.5,-20) ; D12.1@22.5,-6.7 v1(22.5,-5) ; J18.1@22.85,-37.85 v1(25.65,-37.85)
  Bottom Layer w0.3: 28.7,-39.299 28.701,-39.3 J4.6@29.5,-39.3 29.5,-36.55 v1(29.55,-36.5)
  Bottom Layer w0.6: v1(7.5,-37.5) v1(7.5,-20) v1(7.5,-5) ; J18.1@22.5,-37.5 v1(22.5,-20) v1(22.5,-5) ; v1(25.65,-37.85) 27.099,-39.299 28.7,-39.299
GND: J1.2 J1.7 J1.8 J2.5 J2.7 J2.8 J3.5 J3.7 J3.8 J4.2 J4.7 J4.8 J5.1 J6.1 J27.1 J28.1 J49.5 J50.2 J51.2 J52.5 | length 157.1
  Top Layer w0.3: v1(-34.25,-37.4) -34.113,-37.4 -32.056,-35.344 ccw(c-33.4,-34) -31.5,-34 -31.5,-8.5 v1@-31.7,-8.3 ; v1(-34.25,37.4) -34.113,37.4 -32.057,35.344 cw(c-33.4,34) -31.5,34 -31.5,9.046 -31.5,8.5 v1@-31.7,8.3 ; v1@-31.7,-8.138 -31.5,-7.938 -31.5,-7.807 J51.2@-31.5,-4.01 J51.2@-31.5,-4 ; v1@-31.7,8.138 -31.5,7.938 -31.5,6.549 J49.5@-31.5,4.01 J49.5@-31.5,4 ; J52.5@31.5,-4 J52.5@31.5,-4.01 31.5,-5.76 31.5,-7.938 v1@31.7,-8.138 ; J50.2@31.5,4 J50.2@31.5,4.01 31.5,7.938 v1@31.7,8.138 ; v1@31.7,-8.3 31.5,-8.5 31.5,-34 ccw(c33.4,-34) 32.056,-35.344 34.113,-37.4 v1(34.25,-37.4) ; v1@31.7,8.3 31.5,8.5 31.5,34 cw(c33.4,34) 32.056,35.344 34.113,37.4 v1(34.25,37.4)
  Bottom Layer w0.2: J3.7@-32.9,-37 -32.9,-38.05 -32.35,-38.6 -31.5,-38.6 J3.5@-31.5,-39.3 ; J1.8@-32.9,37 -32.9,38.05 -32.35,38.6 -31.5,38.6 J1.2@-31.5,39.3 ; J4.2@31.5,-39.3 31.5,-38.6 32.35,-38.6 32.9,-38.05 J4.8@32.9,-37 ; J2.5@31.5,39.3 31.5,38.6 32.35,38.6 32.9,38.05 J2.7@32.9,37
  Bottom Layer w0.3: -32.5,-7.2 -32.5,-7.419 v1(-31.7,-8.219) ; -32.5,7.2 -32.5,7.419 v1(-31.7,8.219) ; v1(31.7,-8.219) 32.5,-7.419 32.5,-7.2 ; v1(31.7,8.219) 32.5,7.419 32.5,7.2
GND_01: J53.5 J54.2 | length 139.5
  Top Layer w0.3: v1@-18.7,-27.562 -18.5,-27.762 J53.5@-18.5,-31.69 J53.5@-18.5,-31.7 ; v1@-18.7,-27.4 -18.5,-27.2 -18.5,28.5 cw(c-15,28.5) -15,32 cw(c-15,28.5) -11.5,28.5 -11.5,6 -11,5.5 -11,-0.5 v1(-13,-2.5) ; -14,-28.5 -14,-28.281 v1(-13.2,-27.481) ; -14,-4.415 -14.002,-4.417 -13.679,-4.74 v1(-12.75,-4.74)
  Bottom Layer w0.3: -19.5,-28.5 -19.5,-28.281 v1(-18.7,-27.481) ; v1@-13.2,-27.562 -13,-27.762 -13,-29.151 J54.2@-13,-31.69 ; v1@-13.2,-27.4 -13,-27.2 -13,-16.095 -13,-4.99 v1(-12.75,-4.74) -12.5,-4.49 -12.5,-3 v1(-13,-2.5) ; v1(-11.25,5.75) -11.25,4.25 -10.5,3.5
GND_02: J55.5 J60.2 | length 66.1
  Top Layer w0.3: J60.2@-2,-31.69 -2,-27.762 v1@-1.8,-27.562 ; J55.5@-2,31.69 -2,27.762 v1@-1.8,27.562 ; v1@-1.8,-27.4 -2,-27.2 -2,27.2 v1@-1.8,27.4
  Bottom Layer w0.3: v1(-1.8,-27.481) -1,-28.281 -1,-28.5 ; v1(-1.8,27.481) -1,28.281 -1,28.5
GND_03: J56.5 J61.2 | length 31
  Top Layer w0.3: J61.2@3.5,3.31 3.5,7.238 v1@3.7,7.438 ; J56.5@3.5,31.69 3.5,27.762 v1@3.7,27.562 ; v1@3.7,7.6 3.5,7.8 3.5,27.2 v1@3.7,27.4
  Bottom Layer w0.3: v1(3.7,7.519) 4.5,6.719 4.5,6.5 ; v1(3.7,27.481) 4.379,28.159 4.379,28.5
GND_04: J57.5 J62.2 | length 31.1
  Top Layer w0.3: J62.2@3.5,-31.69 3.5,-27.762 v1@3.7,-27.562 ; J57.5@3.5,-3.31 3.5,-7.238 v1@3.7,-7.438 ; v1@3.7,-27.4 3.5,-27.2 3.5,-7.8 v1@3.7,-7.6
  Bottom Layer w0.3: v1(3.7,-27.481) 4.5,-28.281 4.5,-28.5 ; v1(3.7,-7.519) 4.5,-6.719 4.5,-6.5
GND_05: J58.5 J63.2 | length 49.4
  Top Layer w0.3: J63.2@13,-23.69 13,-19.981 13.2,-19.781 v1(13.2,-19.7) 13.2,-19.619 13,-19.419 13,18.919 v1@13.2,19.119 ; J58.5@13,23.234 13,19.481 v1@13.2,19.281
  Bottom Layer w0.3: v1(13.2,-19.7) 14,-20.5 ; v1(13.2,19.2) 13.2,19.244 14,20.044
GND_06: J59.5 J64.2 | length 49.2
  Top Layer w0.3: J64.2@18.5,-23.69 18.5,-21.261 18.5,-19.981 v1@18.7,-19.781 ; J59.5@18.5,23.234 18.5,19.481 v1@18.7,19.281 ; v1@18.7,-19.619 18.5,-19.419 18.5,18.919 v1@18.7,19.119
  Bottom Layer w0.3: v1(18.7,-19.7) 19.5,-20.5 ; v1(18.7,19.2) 19.5,20 19.5,20.044
GND_07: J65.5 J67.2 | length 85.9
  Top Layer w0.3: J67.2@-43.5,-38.65 -43.5,-34.762 v1@-43.3,-34.562 ; J65.5@-43.5,44.5 -43.5,40.562 v1@-43.3,40.362 ; v1@-43.3,-34.4 -43.5,-34.2 -43.5,40 v1@-43.3,40.2
  Bottom Layer w0.3: v1(-43.3,-34.481) -42.5,-35.281 -42.5,-35.5 ; v1(-43.3,40.281) -42.5,41.081 -42.5,41.3